# Altium PCB PCB.PcbDoc
Units mm, origin at the board's own origin, x right, y up, seen from the top; angles counter-clockwise.
Board outline 81 x 35 mm, 2 copper layers (Top Layer, Bottom Layer); 25 components, 13 nets, 66 pads, 0 vias.
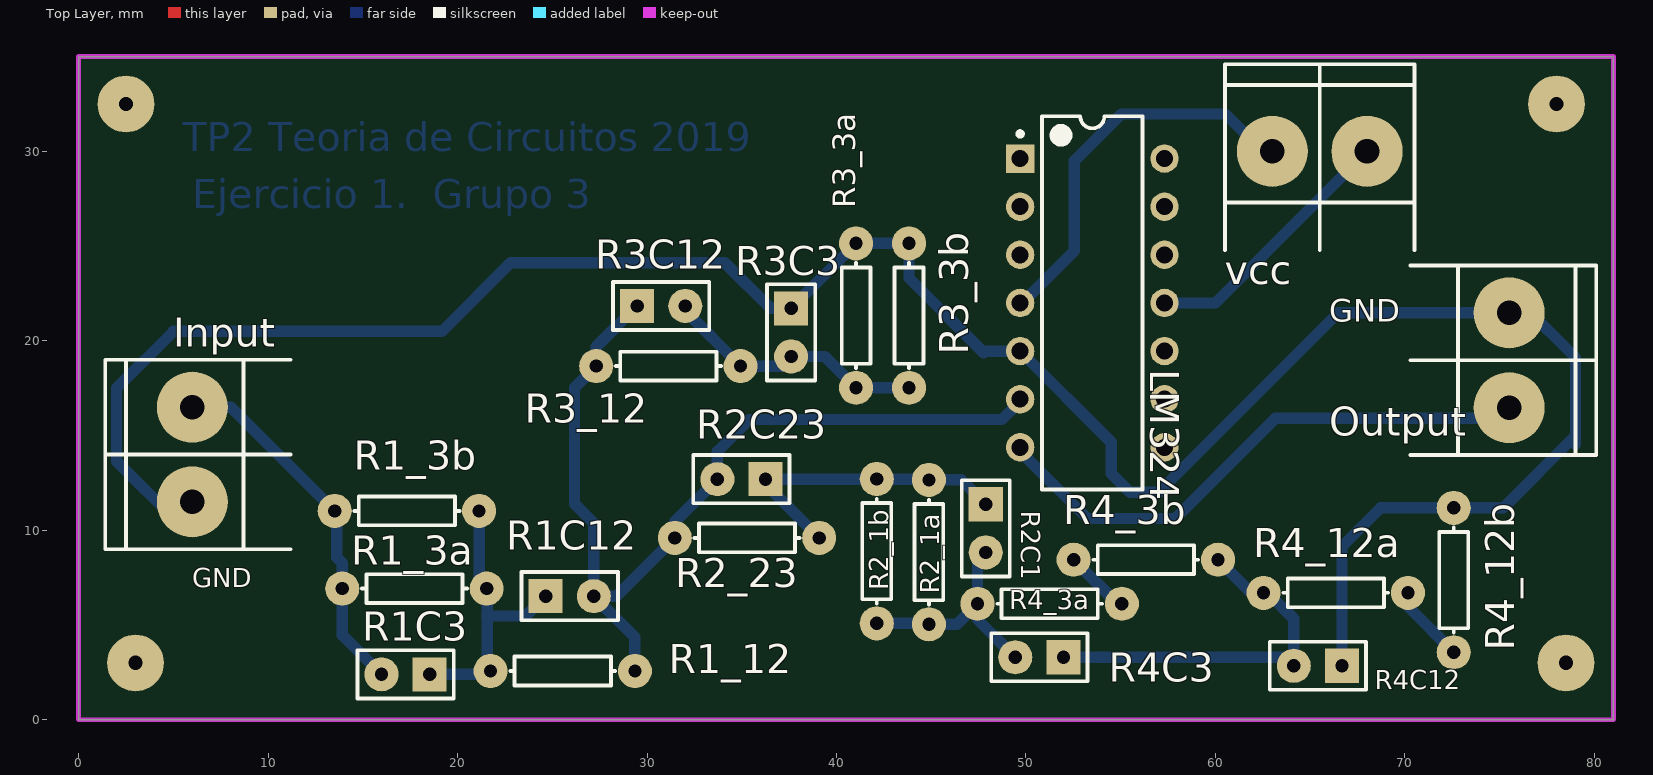
[diagram p0: Top Layer view]
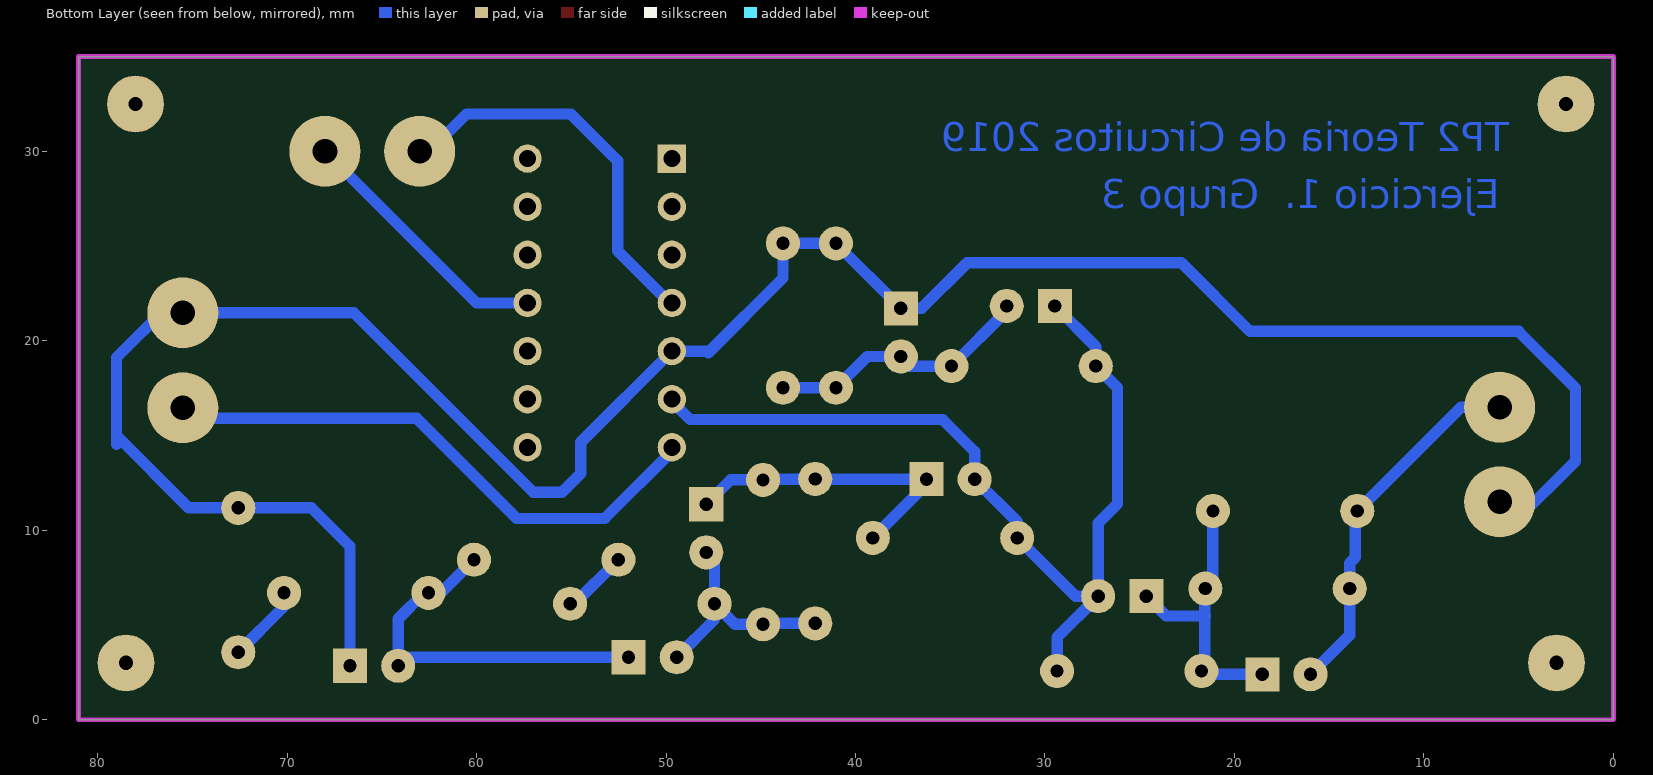
[diagram p1: Bottom Layer view, seen from below]

## Layer stack, top to bottom
Top Solder: solder mask 0.0102, Solder Resist, Dk 3.5
Top Layer: signal copper 0.0356
Dielectric 1: dielectric 0.32, FR-4, Dk 4.8
Bottom Layer: signal copper 0.0356
Bottom Solder: solder mask 0.0102, Solder Resist, Dk 3.5

## Board outline
0,0 0,35 81,35 81,0

## Design rules (kind name [scope] priority, off if disabled: settings)
Clearance [All] p1: gap=0.3
PolygonConnect [All] p1: connectstyle=Relief reliefconductorwidth=0.254 reliefentries=4 polygonreliefangle="90 Angle" airgapwidth=0.254
RoutingVias [All] p1: holewidth=0.711 width=1.27 viastyle="Through Hole" minholewidth=0.711 minwidth=1.27 maxholewidth=0.711 maxwidth=1.27
SolderMaskExpansion [All] p1: expansion=0.102
Width [All] p1: maxlimit=0.6 minlimit=0.6 preferedwidth=0.6
30 further rules are at their usual default settings.

## Components (designator, comment, footprint, x,y, rotation, side; value= is the part's Value field where it differs from the comment)
Input "BORNERA 2" BORNERA2 6,14 r0 top
LM324 "LM324N" N14A 53.5,22 r0 top
Output "BORNERA 2" BORNERA2 75.5,18.975 r180 top
R1_3a "Res1" AXIAL-0.3 17.725,6.925 r0 top
R1_3b "Res1" AXIAL-0.3 17.325,11.025 r0 top
R1_12 "Res1" AXIAL-0.3 25.55,2.575 r0 top
R1C3 "Header 2" HDR1X2 18.525,2.4 r180 top
R1C12 "Header 2" HDR1X2 24.65,6.525 r0 top
R2_1a "Res1" AXIAL-0.3 44.875,8.85 r90 top
R2_1b "Res1" AXIAL-0.3 42.125,8.9 r90 top
R2_23 "Res1" AXIAL-0.3 35.275,9.6 r180 top
R2C1 "Header 2" HDR1X2 47.875,11.375 r270 top
R2C23 "Header 2" HDR1X2 36.25,12.7 r180 top
R3_3a "Res1" AXIAL-0.3 41.033,21.335 r270 top
R3_3b "Res1" AXIAL-0.3 43.827,21.335 r270 top
R3_12 "Res1" AXIAL-0.3 31.127,18.668 r180 top
R3C3 "Header 2" HDR1X2 37.604,21.716 r270 top
R3C12 "Header 2" HDR1X2 29.476,21.843 r0 top
R4_3a "Res1" AXIAL-0.3 51.25,6.125 r0 top
R4_3b "Res1" AXIAL-0.3 56.325,8.45 r0 top
R4_12a "Res1" AXIAL-0.3 66.35,6.7 r0 top
R4_12b "Res1" AXIAL-0.3 72.575,7.375 r90 top
R4C3 "Header 2" HDR1X2 51.975,3.3 r180 top
R4C12 "Header 2" HDR1X2 66.675,2.85 r180 top
vcc "BORNERA 2" BORNERA2 65.5,30 r270 top (schematic designator Alimentación)

## Footprints (in the part's own frame and the unit in brackets; to place one, negate y for a bottom-side part, rotate by r counter-clockwise, add the part's x,y. Pads: shape width x height; smd on the part's side, far side on the other; paste and mask are expansions set on the pad)
AXIAL-0.3 [mm] "Axial Device, Thru-Hole; 2 Leads; 0.3 in Pin Spacing"
  round 1.8 hole 0.7: 1(-3.81,0) 2(3.81,0)
  silkscreen extent -2.77,-0.76 2.77,0.76
BORNERA2 [mm] "Bornera con Tornillos 5mm separación"
  round 3.75 hole 1.3: 1(0,2.5) 2(0,-2.5)
  silkscreen extent -4.6,-5 5.2,5, body extent -3.76,-4.89 3.94,5.61, height 10
HDR1X2 [mm] "Connector; Header; 2 Position"
  rect 1.8x1.8 hole 0.7: 1(0,0)
  round 1.8 hole 0.7: 2(2.54,0)
  silkscreen extent -1.27,-1.27 3.81,1.27
N14A [mm] "DIP, 14-Leads, Row Spacing 7.62mm, Pitch 2.54mm, Body 19.56x6.35mm"
  rect 1.5x1.5 hole 0.9: 1(-3.81,7.62)
  round 1.5 hole 0.9: 2(-3.81,5.08) 3(-3.81,2.54) 4(-3.81,0) 5(-3.81,-2.54) 6(-3.81,-5.08) 7(-3.81,-7.62) 8(3.81,-7.62) 9(3.81,-5.08) 10(3.81,-2.54) 11(3.81,0) 12(3.81,2.54) 13(3.81,5.08) 14(3.81,7.62)
  silkscreen extent -3.93,-9.85 2.65,9.85, body extent -3.55,-9.85 3.55,9.85, height 5.08

## Part data
LM324: "Low Power Quad Operational Amplifier, 14-pin MDIP"
R1_3a R1_3b R1_12 R2_1a R2_1b R2_23 R3_3a R3_3b R3_12 R4_3a R4_3b R4_12a R4_12b: "Resistor"
R1C3 R1C12 R2C1 R2C23 R3C3 R3C12 R4C3 R4C12: "Header, 2-Pin"

## Free pads (board coordinates)
  round 3 hole 0.762: 0(2.5,32.5) 1(3,3) 2(78.5,3) 3(78,32.5)

## Nets (pads, with @x,y where several pads share a name; then routed paths per layer and width w, separated by ;. In a path a pad name is that pad's centre, name@x,y a point inside that pad or via, vN(x,y) a via of type N, cw(c..) or ccw(c..) an arc to the next point about the centre after c; other vN are vias at no path point)
-VCC: LM324.11 vcc.1 | length 14
  Bottom Layer w0.6: LM324.11 60,22 vcc.1
GND: Input.2 LM324.5 Output.2 R3_3a.1 R3_3b.1 R3C3.1 R4_12b.2 R4C12.1 | length 130.4
  Bottom Layer w0.6: Input.2@6.002,11.277 5.188,10.463 2,13.65 2,17.5 5,20.5 19.175,20.5 22.8,24.125 34.1,24.125 36.509,21.716 R3C3.1 R3_3a.1 R3_3b.1 43.827,23.323 47.775,19.375 47.86,19.46 LM324.5 54.5,14.65 54.5,13 55.5,12 57,12 66.475,21.475 Output.2 75.5,21.841 76.272,21.841 79,19.113 79,14.55 ; LM324.5@49.568,19.375 LM324.5@49.642,19.301 ; R4C12.1 66.675,9.15 68.71,11.185 R4_12b.2 75.185,11.185 79,15
NetInput_1: Input.1 R1_3a.1 R1_3b.1 R1C3.2 | length 19.4
  Bottom Layer w0.6: Input.1 8.04,16.5 R1_3b.1 13.615,10.925 13.615,8.575 13.915,8.275 13.915,4.47 R1C3.2
NetLM324_6: LM324.6 R1_12.2 R1C12.2 R2_23.2 R2C23.2 R3_12.2 R3C12.1 | length 50
  Bottom Layer w0.6: R1_12.2 29.36,4.355 R1C12.2 ; R3C12.1 27.317,19.684 R3_12.2 26.174,17.525 26.174,11.401 27.19,10.385 R1C12.2 ; LM324.6@49.642,16.761 48.731,15.85 35.4,15.85 33.71,14.16 R2C23.2 31.465,10.455 R2_23.2 28.39,6.525 R1C12.2
NetLM324_7: LM324.7 Output.1 | length 29.5
  Bottom Layer w0.6: LM324.7@49.642,14.221 53.238,10.625 57.875,10.625 63.162,15.912 Output.1@75.5,15.912
NetR1_3a_2: R1_3a.2 R1_3b.2 R1_12.1 R1C3.1 R1C12.1 | length 15.4
  Bottom Layer w0.6: R1C3.1 21.565,2.4 21.565,5.475 ; R1_3b.2 21.135,7.325 R1_3a.2 ; 21.535,5.475 21.565,5.475 ; R1_3a.2@21.565,6.925 21.565,5.475 ; R1C12.1 23.6,5.475 21.565,5.475
NetR2_1a_1: R2_1a.1 R2_1b.1 R2C1.2 R4_3a.1 R4C3.2 | length 12.3
  Bottom Layer w0.6: R2_1b.1 44.825,5.09 R2_1a.1 46.355,5.04 R4_3a.1 ; R2C1.2 47.44,8.4 R4_3a.1 ; R4C3.2 47.44,5.295 R4_3a.1
NetR2_1a_2: R2_1a.2 R2_1b.2 R2_23.1 R2C1.1 R2C23.1 | length 16.4
  Bottom Layer w0.6: R2_23.1 36.25,12.435 R2C23.1 44.835,12.7 R2_1a.2 46.59,12.66 R2C1.1
NetR3_3a_2: R3_3a.2 R3_3b.2 R3_12.1 R3C3.2 R3C12.2 | length 14.2
  Bottom Layer w0.6: R3C12.2 32.016,21.589 R3_12.1 37.096,18.668 R3C3.2 39.382,19.176 R3_3a.2 R3_3b.2
NetR4_3a_2: R4_3a.2 R4_3b.1 | length 3.5
  Bottom Layer w0.6: R4_3b.1 54.84,6.125 R4_3a.2
NetR4_3b_2: R4_3b.2 R4_12a.1 R4C3.1 R4C12.2 | length 20.1
  Bottom Layer w0.6: R4C3.1 63.685,3.3 R4C12.2 64.135,5.335 62.77,6.7 R4_12a.1 61.885,6.7 R4_3b.2
NetR4_12a_2: R4_12a.2 R4_12b.1 | length 4.1
  Bottom Layer w0.6: R4_12a.2 70.16,5.98 R4_12b.1
VCC: LM324.4 vcc.2 | length 20.7
  Bottom Layer w0.6: LM324.4@49.642,21.841 52.55,24.749 52.55,29.5 55.025,31.975 60.525,31.975 vcc.2@62.5,30
pads on no net: LM324.1 LM324.2 LM324.3 LM324.8 LM324.9 LM324.10 LM324.12 LM324.13 LM324.14

## Keep-outs
Keep-Out Layer:
  the board outline again, w0.254

## Other copper
Bottom Layer:
  text "TP2 Teoria de Circuitos 2019" at 5.5,30 h1.52
  text "Ejercicio 1.  Grupo 3" at 6,27 h1.52

## Silkscreen, mask and mechanical layers (free items; w line width, h text height)
Top Overlay:
  text "GND" at 66,21 h1.2
  text "GND" at 6,7 h1